# EAGLE board メイン回路２ (EAGLE 9.6.2)
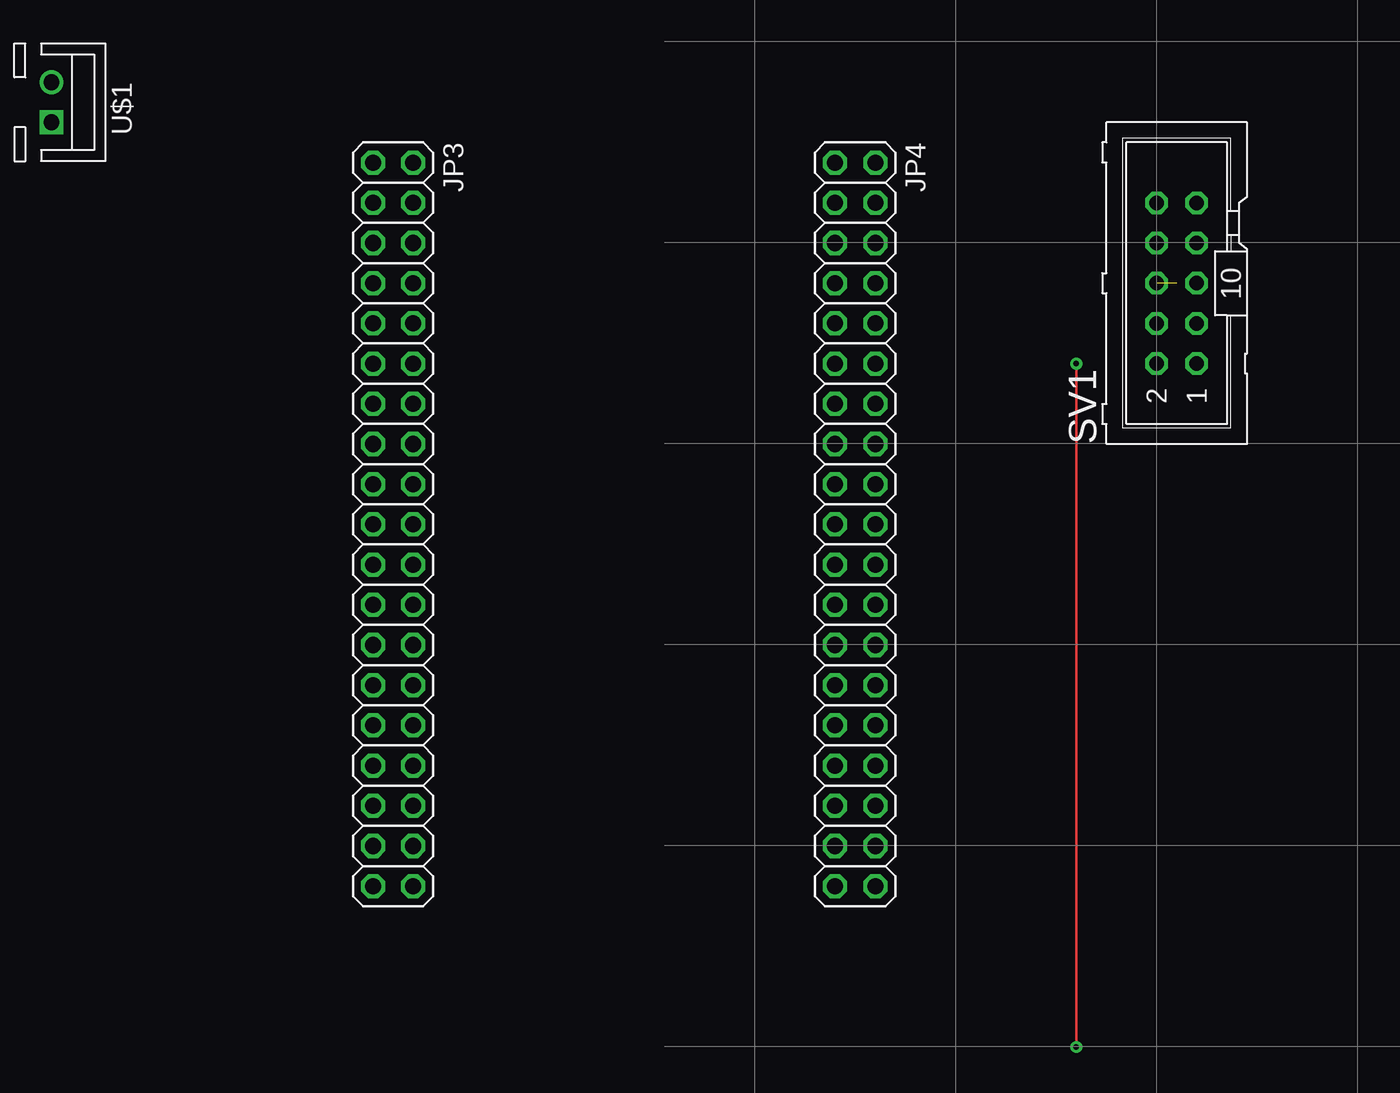
[diagram p0: board, top side]
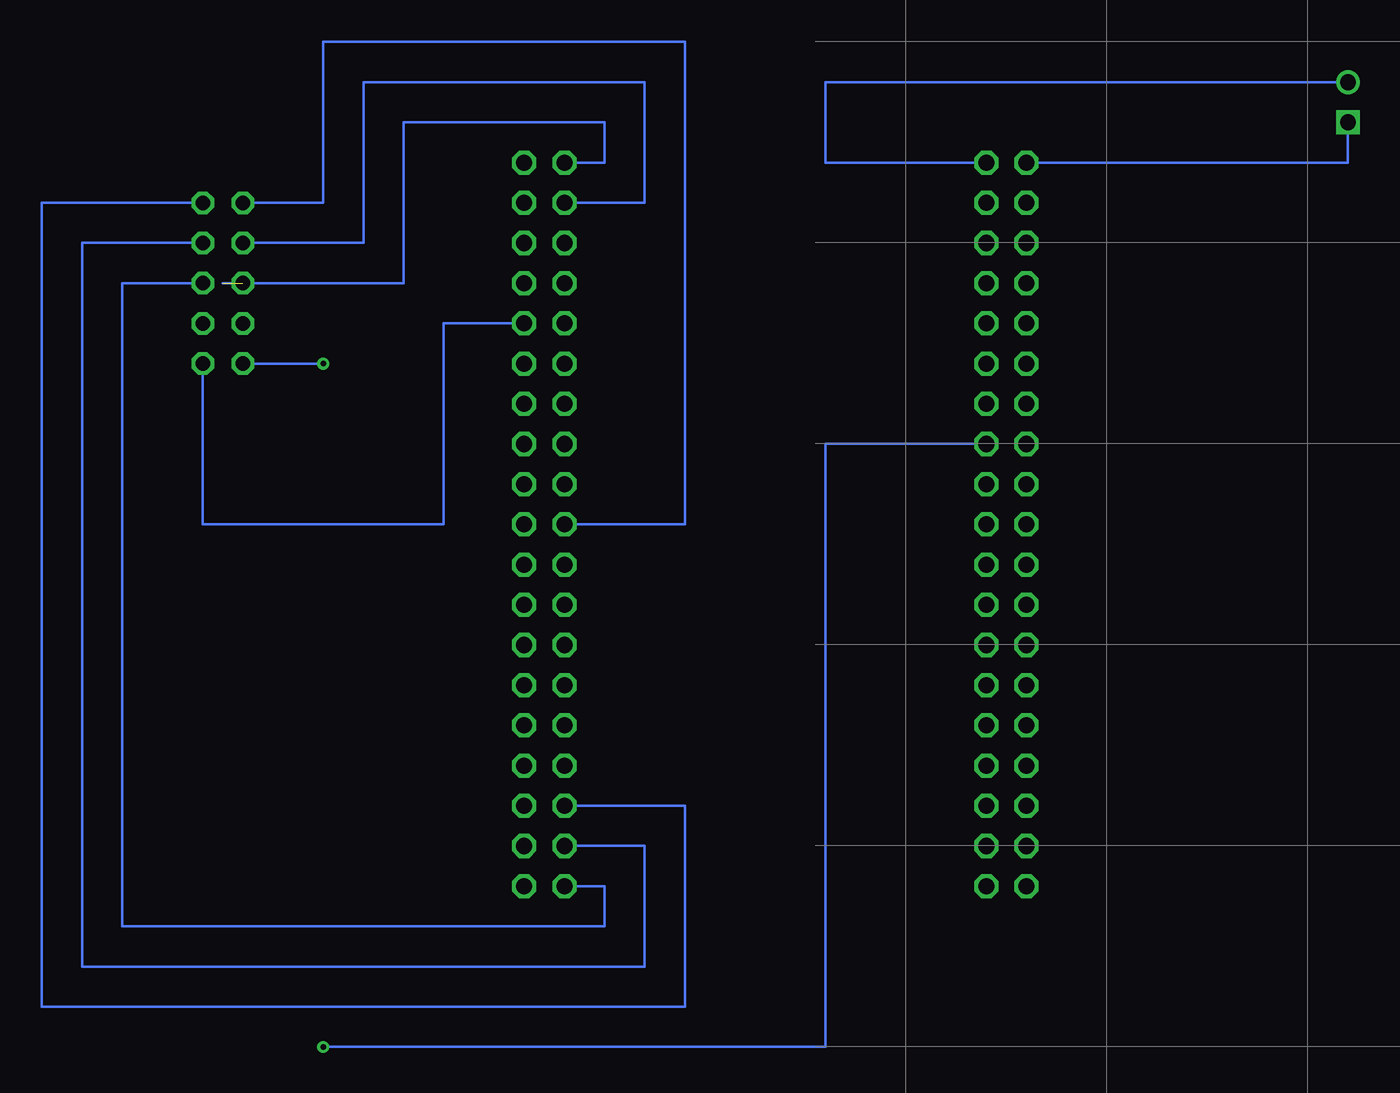
[diagram p1: board, bottom side, seen from below]

No outline drawn. Coordinates in mm, seen from the top.
Copper layers (1*16): Top 0.035mm / dielectric 1.5mm / Bottom 0.035mm
Design rules "default": minimum track width 6mil, minimum drill 0.35mm, track to track 6mil, track to pad 6mil, pad to pad 6mil, via to via 6mil, smd to smd 6mil, copper to edge 40mil, drill to drill 6mil, minimum pad ring 10mil, minimum via ring 8mil, stop-mask expansion 4mil, vias tented up to drill 0mil, thermal gap 10mil

## Footprints (pad centres in the part's own frame; a part is rotated, then mirrored left to right if it is on the bottom)
2X19 = drill 1.016 octagon: 1 -22.86,-1.27; 2 -22.86,1.27; 3 -20.32,-1.27; 4 -20.32,1.27; 5 -17.78,-1.27; 6 -17.78,1.27; 7 -15.24,-1.27; 8 -15.24,1.27; 9 -12.7,-1.27; 10 -12.7,1.27; 11 -10.16,-1.27; 12 -10.16,1.27; 13 -7.62,-1.27; 14 -7.62,1.27; 15 -5.08,-1.27; 16 -5.08,1.27; 17 -2.54,-1.27; 18 -2.54,1.27; 19 0,-1.27; 20 0,1.27; 21 2.54,-1.27; 22 2.54,1.27; 23 5.08,-1.27; 24 5.08,1.27; 25 7.62,-1.27; 26 7.62,1.27; 27 10.16,-1.27; 28 10.16,1.27; 29 12.7,-1.27; 30 12.7,1.27; 31 15.24,-1.27; 32 15.24,1.27; 33 17.78,-1.27; 34 17.78,1.27; 35 20.32,-1.27; 36 20.32,1.27; 37 22.86,-1.27; 38 22.86,1.27
ML10 = drill 0.914 octagon: 1 -5.08,-1.27; 2 -5.08,1.27; 3 -2.54,-1.27; 4 -2.54,1.27; 5 0,-1.27; 6 0,1.27; 7 2.54,-1.27; 8 2.54,1.27; 9 5.08,-1.27; 10 5.08,1.27
B2B-XH = drill 1 square: 1 1.27,0 | drill 1: 2 -1.27,0

## Placement (x,y rotation side)
JP3  [2X19]  40.64,48.26 270 top
JP4  [2X19]  69.85,48.26 270 top
SV1  [ML10]  90.17,63.5 90 top
U$1  02-JST  [B2B-XH]  19.05,74.93 270 top
U$2  [TYPE.B]  127,2.54 90 top
U$3  [TYPE.B]  -16.51,2.54 90 bottom

## Library data of the parts
JP3 JP4 = pinhead
SV1 = con-ml; OC_FARNELL: unknown; OC_NEWARK: unknown
U$1 = con-jst-xh (1)
U$2 U$3 = prototyping-board (2)

## Nets
N$2: JP4.1 SV1.6
N$3: JP4.3 SV1.8
N$4: JP4.19 SV1.10
N$6: JP4.37 SV1.5
N$7: JP4.35 SV1.7
N$8: JP4.33 SV1.9
N$10: JP4.10 SV1.1
N$11: JP3.16 SV1.2
N$12: JP3.2 U$1.2
N$13: JP3.1 U$1.1

## Tracks (layer width: path | path; a pad name or v marks a point on that pad's centre or on a via)
N$2  (1 unrouted)
  Bottom 0.152: JP4.1 66.04,71.12 66.04,73.66 78.74,73.66 78.74,63.5 90.17,63.5
N$3
  Bottom 0.152: SV1.8 81.28,66.04 81.28,76.2 63.5,76.2 63.5,68.58 JP4.3
N$4
  Bottom 0.152: JP4.19 60.96,48.26 60.96,78.74 83.82,78.74 83.82,68.58 SV1.10
N$6
  Bottom 0.152: JP4.37 66.04,25.4 66.04,22.86 96.52,22.86 96.52,63.5 SV1.5
N$7
  Bottom 0.152: SV1.7 99.06,66.04 99.06,20.32 63.5,20.32 63.5,27.94 JP4.35
N$8
  Bottom 0.152: SV1.9 101.6,68.58 101.6,17.78 60.96,17.78 60.96,30.48 JP4.33
N$10
  Bottom 0.152: JP4.10 76.2,60.96 76.2,48.26 91.44,48.26 SV1.1
N$11  (via drill 0.35)
  Top 0.152: v83.82,58.42 v83.82,15.24
  Bottom 0.152: SV1.2 v83.82,58.42 | JP3.16 52.07,53.34 52.07,15.24 v83.82,15.24
N$12
  Bottom 0.152: U$1.2 52.07,76.2 52.07,71.12 JP3.2
N$13
  Bottom 0.152: JP3.1 19.05,71.12 U$1.1